# Altium PCB ESP32 with USBC.PcbDoc (part 3 of 4)
Units mil, origin at the board's own origin, x right, y up, seen from the top; angles counter-clockwise.
Board outline 2800 x 1000 mil, 4 copper layers (L1, L2, L3, L4), stack 61.583 mil thick; 64 components, 73 nets, 299 pads, 157 vias.
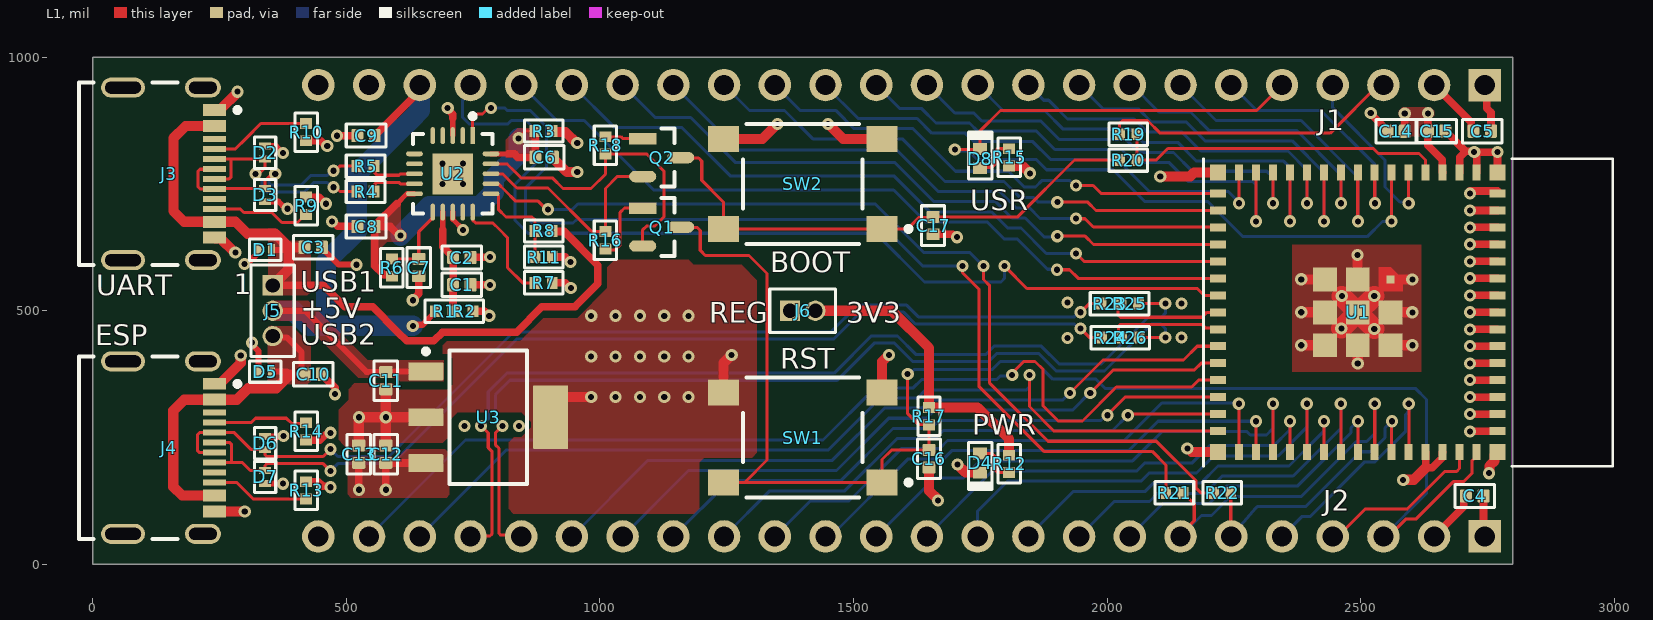
[diagram p0: L1 view]

## Via types
v1: diameter 24, hole 12, L1 to L4, tented both sides, 157 vias

## Nets (pads, with @x,y where several pads share a name; then routed paths per layer and width w, separated by ;. In a path a pad name is that pad's centre, name@x,y a point inside that pad or via, vN(x,y) a via of type N, cw(c..) or ccw(c..) an arc to the next point about the centre after c; other vN are vias at no path point) (continued)
+5V_VBUS1: (continued)
  L1 w15: J5.1@355,550 363.71,550 385,550 ; 386.5,550 455.13,550 497.35,507.77 551.89,507.77 601.76,457.9 619.04,440.62 672.56,440.62 689.84,457.9 835.87,457.9 885.74,507.77 951.02,507.77 996.28,553.04 996.28,589.52 929.55,656.25 907.31,656.25 R8.2@906.3,657.26
  L1 w20: J3.B4A9@240,675.55 180.19,675.55 159.2,696.54 159.2,840.09 183.52,864.41 J3.A4B9@240.12,864.41 ; J3.B4A9@240.12,675.43 281.71,675.43 305.34,651.81 359.78,651.81 386.59,625 ; J5.1@355,550 386.59,581.59 386.59,625 ; C3.2@417.8,625 386.59,625
+5V_VBUS2: C10.2 D5.2 J4.A4B9 J4.B4A9 J5.3 | length 681.3
  L1 w12: D5.2@352.8,380 383,380 389,374 416.8,374 C10.2@417.8,375 411.98,380.81 411.98,418.02 382.37,447.63 357.37,447.63 J5.3@355,450
  L1 w20: J4.B4A9@240.12,135.59 176.41,135.59 159,153 159,303 180.57,324.57 284.12,324.57 303,343.45 306.64,347.09 362.09,347.09 389,374
+VCC_FTDI: C1.2 C2.2 R1.2 R2.2 U2.12 | length 204.4
  L1 w10.01: 690.32,660 U2.12@690.32,694.59
  L1 w15: 690.32,660 690.32,626.74 706.48,610.57 706.48,609.19 C2.2@710.8,604.88 C1.2@710.8,551 710.41,550.61 710.41,499.39 R1.2@710.02,499
"BTN GPIO0": C17.2 Q2.3 R20.1 SW2.1 SW2.2 | length 1033.4
  L1 w6: Q2.3@1159.42,802 1160.42,801 1194.8,801 1201,794.8 1201,757 1243.5,714.5 SW2.2@1243.5,661.42 SW2.1@1556.5,661.42 1606.92,661.42 1628.81,683.31 1655.1,683.31 C17.2@1657,685.2 1824.2,685.2 1936.06,797.06 R20.1@2025.17,797.06
CHIP_PU: C16.2 J2.3 Q1.3 R17.1 SW1.1 SW1.2 U1.45 | length 2937
  L1 w6: Q1.3@1159.42,665 1160.3,664.13 1192.13,664.13 1197.99,658.27 1197.99,619.01 1208,609 1294,609 1329.74,573.26 1329.74,205.64 1285.52,161.42 ; SW1.2@1243.5,161.42 1285.52,161.42 ; v1(1607,375) 1607,297 1628.05,275.95 1648.04,275.95 R17.1@1649,274.99 C16.2@1649,225.2 1575.2,225.2 1556.5,206.5 SW1.1@1556.5,161.42 1285.52,161.42 ; J2.3@2550,50 2589,89 2609,89 2682.94,162.94 2702.94,162.94 2720,180 2720,204.8 2728.66,213.46 U1.45@2728.66,221.34
  L4 w6: v1(1607,375) 1610.79,375 1619.79,384 1773.72,384 1789.72,400 1835.82,400 1858.18,400 1893.18,365 1978.18,365 1996.18,347 2607.82,347 2630,324.82 2630,140 J2.3@2545,55
CON1_USB_N: D2.2 J3.A7 J3.B7 R4.1 | length 438.4
  L1 w6.03: J3.A7@240.12,760.08 269.08,760.08 273,764 273,799.45 ; J3.B7@240.12,799.45 273,799.45 ; v1@328,770 340,782 D2.2@340,801 ; D2.2@333.6,799.45 273,799.45 ; v1@474.5,746.5 476.02,746.5 487.52,735 R4.1@520.99,735
  L4 w6.03: v1(321,770) 333.49,757.52 333.49,745.47 345.24,733.72 416.81,733.72 435.83,752.73 462.48,752.73 471.72,743.5 v1(475,743.5)
CON1_USB_P: D3.2 J3.A6 J3.B6 R5.1 | length 449.5
  L1 w6.03: J3.A6@240.12,779.76 239.35,779 211.53,779 208,775.47 208,743.93 211.53,740.39 J3.B6@240.12,740.39 240.42,740.7 339.7,740.7 D3.2@340,741 340,756 v1@354,770 ; v1@475,773 487,785 R5.1@520.99,785
  L4 w6.03: v1(360,770) 347.51,757.52 347.51,751.28 351.05,747.75 411,747.75 430.01,766.77 462.48,766.77 471.72,776 v1(475,776)
CON2_USB_N: D6.2 J4.A7 J4.B7 R23.1 | length 2030.7
  L1 w6.03: J4.A7@240.12,220.24 210.53,220.24 207,223.77 207,256.07 210.53,259.61 279.39,259.61 313,226 D6.2@340,226 340,216.05 343.53,212.52 454.51,212.52 v1(469,227) ; v1(1948,497) 1965,514 R23.1@1987.99,514
  L4 w6.03: v1(469,227) 483.49,212.52 584.49,212.52 829.89,457.92 1455.08,457.92 1508.27,511.11 1604.89,511.11 1627.99,488.02 1935.48,488.02 1944.47,497 v1(1948,497)
CON2_USB_P: D7.2 J4.A6 J4.B6 R24.1 | length 1990.4
  L1 w6.03: J4.B6@240.12,200.55 274.08,200.55 ; J4.A6@240.12,239.92 270.55,239.92 274.08,236.39 274.08,200.55 ; v1(469,184) 454.51,198.48 343.53,198.48 340,194.95 D7.2@340,185 311,185 295.45,200.55 274.08,200.55 ; v1(1948,465) 1966,447 R24.1@1984.99,447
  L4 w6.03: v1(469,184) 483.49,198.48 590.3,198.48 835.7,443.89 1460.89,443.89 1514.08,497.08 1599.08,497.08 1622.17,473.98 1935.48,473.98 1944.47,465 v1(1948,465)
"CON GPIO0": J1.3 R19.1 | length 600.3
  L1 w6: R19.1@2024.99,848 2024.99,869.13 2030.85,874.99 2080.01,874.99 2105,850 2440,850 2540,950 J1.3@2550,950